# EAGLE board ATESLEME (EAGLE 9.6.2)
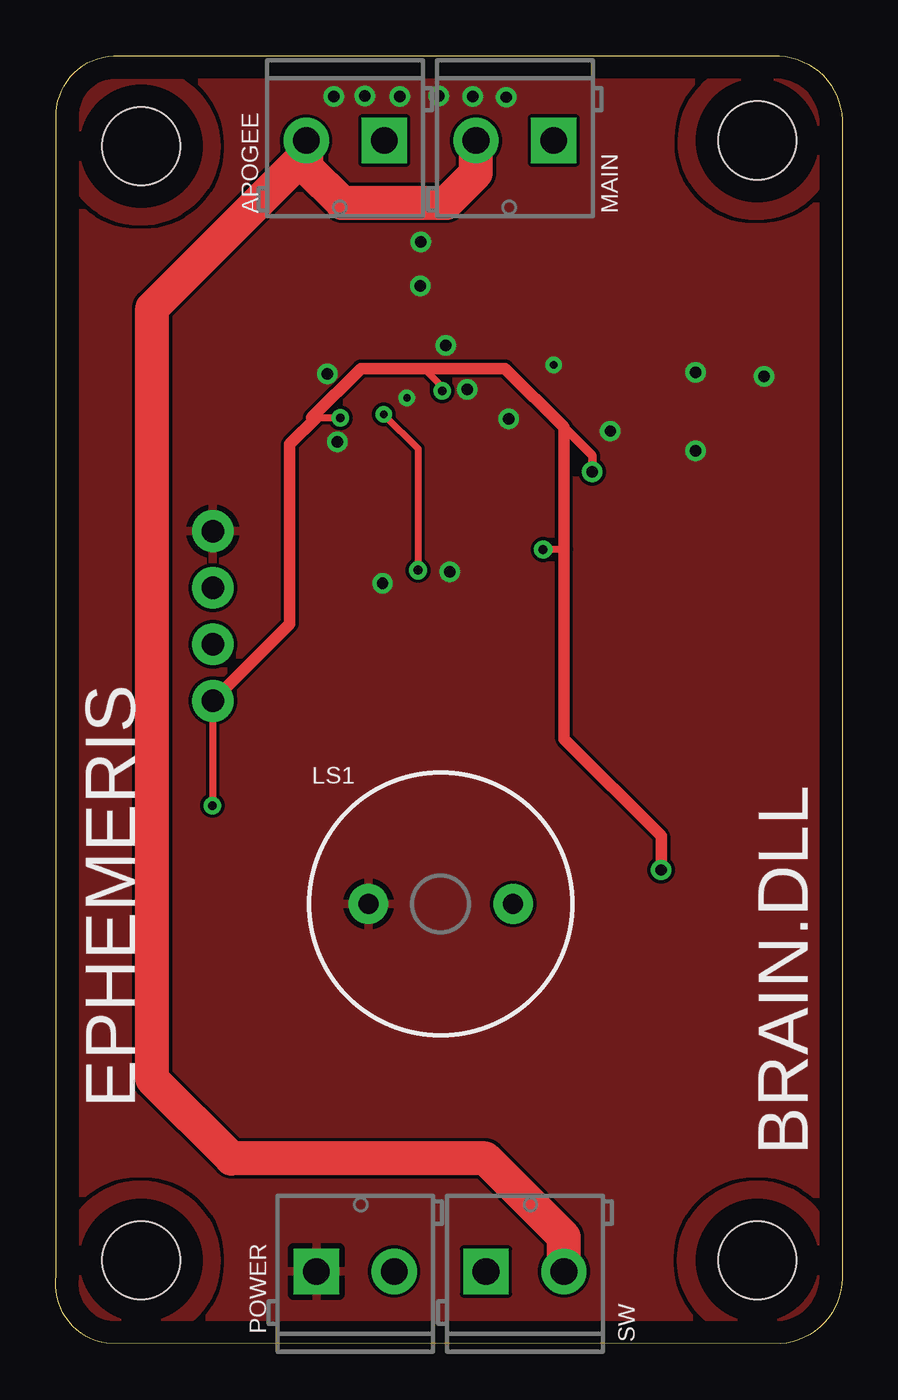
[diagram p0: board, top side]
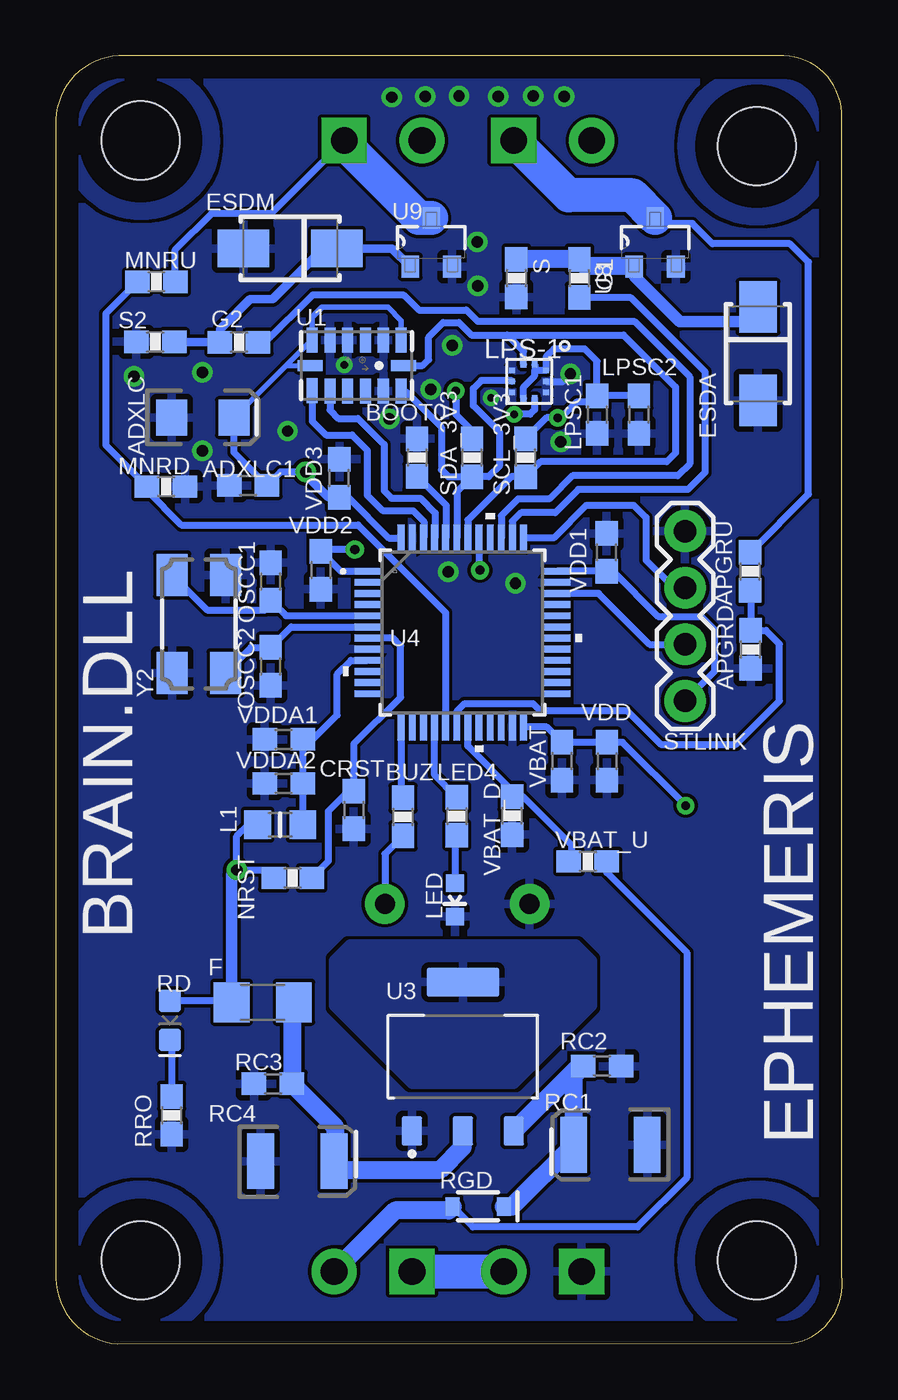
[diagram p1: board, bottom side, seen from below]

Size 35.34 x 57.86 mm. Coordinates in mm from the lower left corner, seen from the top.
Outline: 35.33,54.99 35.33,3.23 arc-90 32.56,0 2.29,0.03 arc-90 0.03,3.07 0.03,55.07 arc-90 2.62,57.86 32.23,57.86 arc-90 35.33,54.99
Copper layers (1*16): Top 0.035mm / dielectric 1.5mm / Bottom 0.035mm
Design rules "default": minimum track width 6mil, minimum drill 0.35mm, track to track 6mil, track to pad 6mil, pad to pad 6mil, via to via 6mil, smd to smd 6mil, copper to edge 40mil, drill to drill 6mil, minimum pad ring 10mil, minimum via ring 8mil, stop-mask expansion 4mil, vias tented up to drill 0mil, thermal gap 10mil
Holes 3.5 mm at 3.84,3.75 31.52,3.75 31.52,54.05 3.84,53.8

## Footprints (pad centres in the part's own frame; a part is rotated, then mirrored left to right if it is on the bottom)
EIA3216 = smd 1.4 x 1.6: + 1.4,0; - -1.4,0
0603 = smd 1.1 x 1: 1 -0.85,0; 2 0.85,0
0603-RES = smd 1.1 x 1: 1 -0.85,0; 2 0.85,0
SCREWTERMINAL-3.5MM-2-NS = drill 1.2 pad 2.032 square: 1 0,0 | drill 1.2 pad 2.032: 2 3.5,0
WE-TVSP_DO-214AC_UNIDIRECTIONAL = smd 2.3 x 1.7: 1 -2.1,0; 2 2.1,0
1206 = smd 1.6 x 1.8: 1 -1.4,0; 2 1.4,0
RC-MASTER-SMD_L0805MP = smd 1.2 x 1.3: 1 -1.016,0; 2 1.016,0
LED-0603 = smd 0.8 x 0.8: A 0,-0.75; C 0,0.75
LPS22H = smd 0.25 x 0.275: 1 -0.25,-0.762; 2 0.25,-0.762; 6 0.25,0.762; 7 -0.25,0.762 | smd 0.275 x 0.25: 3 0.762,-0.5; 4 0.762,0; 5 0.762,0.5; 8 -0.762,0.5; 9 -0.762,0; 10 -0.762,-0.5
BUZZER-12MM = drill 0.9 pad 1.778: + 3.25,0; - -3.25,0
EIA3528 = smd 1.2 x 2.5: A 1.65,0; C -1.65,0
LED-0603' = smd 1 x 1: A -0.877,0; C 0.877,0
SOD-323 = smd 0.63 x 0.83: A 1.15,0; C -1.15,0
1X04 = drill 1.016 pad 1.88: 1 0,0; 2 2.54,0; 3 5.08,0; 4 7.62,0
LGA14_1:1_PATRICK = smd 0.5 x 1.124: 1 2,1.138; 2 1.2,1.138; 3 0.4,1.138; 4 -0.4,1.138; 5 -1.2,1.138; 6 -2,1.138; 8 -2,-1.13; 9 -1.2,-1.138; 10 -0.4,-1.138; 11 0.4,-1.138; 12 1.2,-1.138; 13 2,-1.138 | smd 1.124 x 0.5: 7 -2.1,0; 14 2.1,0
SOT229P700X180-4N = smd 0.93 x 1.31: 1 -2.29,-3.345; 2 0,-3.345; 3 2.29,-3.345 | smd 3.24 x 1.31: 4 0,3.345
LQFP48-7X7MM = smd 1.194 x 0.305: 1 -4.25,2.75; 2 -4.25,2.25; 3 -4.25,1.75; 4 -4.25,1.25; 5 -4.25,0.75; 6 -4.25,0.25; 7 -4.25,-0.25; 8 -4.25,-0.75; 9 -4.25,-1.25; 10 -4.25,-1.75; 11 -4.25,-2.25; 12 -4.25,-2.75; 25 4.25,-2.75; 26 4.25,-2.25; 27 4.25,-1.75; 28 4.25,-1.25; 29 4.25,-0.75; 30 4.25,-0.25; 31 4.25,0.25; 32 4.25,0.75; 33 4.25,1.25; 34 4.25,1.75; 35 4.25,2.25; 36 4.25,2.75 | smd 0.305 x 1.194: 13 -2.75,-4.25; 14 -2.25,-4.25; 15 -1.75,-4.25; 16 -1.25,-4.25; 17 -0.75,-4.25; 18 -0.25,-4.25; 19 0.25,-4.25; 20 0.75,-4.25; 21 1.25,-4.25; 22 1.75,-4.25; 23 2.25,-4.25; 24 2.75,-4.25; 37 2.75,4.25; 38 2.25,4.25; 39 1.75,4.25; 40 1.25,4.25; 41 0.75,4.25; 42 0.25,4.25; 43 -0.25,4.25; 44 -0.75,4.25; 45 -1.25,4.25; 46 -1.75,4.25; 47 -2.25,4.25; 48 -2.75,4.25
SOT95P240X112-3N = smd 0.972 x 0.802: D 1.092,0; G -1.092,0.94; S -1.092,-0.94
OSCCC500X320X110-4N = smd 1.9 x 1.4: 1 -2.2,-1.2; 2 2.2,-1.2; 3 2.2,1.2; 4 -2.2,1.2

## Placement (x,y rotation side)
ADXLC  10uF  [EIA3216]  28.73,41.61 0 bottom
ADXLC1  0.1uF  [0603]  26.7,38.56 180 bottom
APGRD  3.3k  [0603-RES]  4.12,31.19 90 bottom
APGRU  10k  [0603-RES]  4.14,34.7 90 bottom
APOGEE  [SCREWTERMINAL-3.5MM-2-NS]  14.76,54.05 180 top
BOOT0  10k  [0603-RES]  19.1,39.81 270 bottom
BUZ  22R  [0603-RES]  19.74,23.67 270 bottom
CRST  100nF  [0603]  21.95,23.98 270 bottom
ESDA  12V  [WE-TVSP_DO-214AC_UNIDIRECTIONAL]  3.79,44.48 270 bottom
ESDM  12V  [WE-TVSP_DO-214AC_UNIDIRECTIONAL]  24.8,49.2 180 bottom
F  0.75A  [1206]  26.04,15.34 180 bottom
G1  22  [0603-RES]  11.82,47.86 270 bottom
G2  22  [0603-RES]  27.1,44.98 0 bottom
L1  [RC-MASTER-SMD_L0805MP]  25.25,23.32 0 bottom
LED  GREEN  [LED-0603]  17.4,19.94 180 bottom
LED4  1k  [0603-RES]  17.32,23.7 270 bottom
LPS-1  LPS22  [LPS22H]  14.07,43.23 180 bottom
LPSC1  4.7uF  [0603]  11.02,41.74 270 bottom
LPSC2  100nF  [0603]  9.14,41.74 270 bottom
LS1  BUZZER-PTH  [BUZZER-12MM]  17.3,19.76 0 top
MAIN  [SCREWTERMINAL-3.5MM-2-NS]  22.38,54.05 180 top
MNRD  3.3k  [0603-RES]  30.38,38.51 180 bottom
MNRU  10k  [0603-RES]  30.81,47.7 0 bottom
NRST  10k  [0603-RES]  24.69,20.93 180 bottom
OSCC1  25pF  [0603]  25.68,34.24 90 bottom
OSCC2  25pF  [0603]  25.68,30.43 270 bottom
POWER  [SCREWTERMINAL-3.5MM-2-NS]  11.71,3.25 0 top
RC1  22uF  [EIA3528]  10.42,8.94 180 bottom
RC2  100nF  [0603]  10.8,12.47 0 bottom
RC3  100nF  [0603]  25.58,11.68 180 bottom
RC4  22uF  [EIA3528]  24.49,8.2 0 bottom
RD  Red  [LED-0603']  30.2,14.53 270 bottom
RGD  1A/23V  [SOD-323]  16.36,6.17 180 bottom
RRO  1.5k  [0603-RES]  30.13,10.26 270 bottom
S  3.3k  [0603-RES]  14.64,47.87 270 bottom
S2  3.3k  [0603-RES]  30.86,45.01 180 bottom
SCL_3V3  4.7k  [0603-RES]  14.23,39.8 90 bottom
SDA_3V3  4.7k  [0603-RES]  16.64,39.8 90 bottom
STLINK  [1X04]  7.06,36.5 270 bottom
SW  [SCREWTERMINAL-3.5MM-2-NS]  19.33,3.25 0 top
U1  ADXL345PATRICK  [LGA14_1:1_PATRICK]  21.82,43.94 0 bottom
U3  AMS1117-3.3  [SOT229P700X180-4N]  17.05,12.9 0 bottom
U4  STM32F102CBT6  [LQFP48-7X7MM]  17.07,31.95 0 bottom
U8  [SOT95P240X112-3N]  8.41,49.48 90 bottom
U9  [SOT95P240X112-3N]  18.47,49.48 90 bottom
VBAT  100nF  [0603]  12.59,26.17 270 bottom
VBAT_D  3.3k  [0603-RES]  14.84,23.72 90 bottom
VBAT_U  10k  [0603-RES]  11.43,21.67 0 bottom
VDD  4.7uF  [0603]  10.57,26.17 270 bottom
VDD1  100nF  [0603]  10.59,35.55 90 bottom
VDD2  100nF  [0603]  23.43,34.75 270 bottom
VDD3  100nF  [0603]  22.6,38.88 90 bottom
VDDA1  1uF  [0603]  25.1,27.15 180 bottom
VDDA2  100nF  [0603]  25.1,25.17 180 bottom
Y2  ABM2B-8.000MHZ-10-1-U-T  [OSCCC500X320X110-4N]  28.91,32.33 270 bottom

## Library data of the parts
ADXLC = SparkFun-Capacitors; PROD_ID: CAP-00811
ADXLC1 CRST LPSC1 LPSC2 OSCC1 OSCC2 RC2 RC3 VBAT VDD VDD1-VDD3 VDDA1 VDDA2 = SparkFun-Capacitors; PROD_ID: CAP-00810
APGRD APGRU BOOT0 BUZ G1 G2 LED4 MNRD MNRU NRST RRO S S2 SCL_3V3 SDA_3V3 VBAT_D VBAT_U = SparkFun-Resistors; PROD_ID: RES-08296
APOGEE MAIN POWER SW = SparkFun-Connectors; PROD_ID: CONN-08399
ESDA ESDM = Wurth_EMC Components_WE-TVSP; DATASHEET-URL: https://www.we-online.com/catalog/datasheet/824500102.pdf; IPEAK: 2.5A; MOUNT: SMT; PART-NUMBER: 824500102; PDISS: 400W; VBR: 117V; VCLAMP: 162V
F = SparkFun-Fuses; PROD_ID: RES-11150
L1 = 52101-101-REV-A_v16
LED = SparkFun-LED; PROD_ID: DIO-00819
LPS-1 = Arduino-Sensors; CODE-ARDUINO: A5390; DATASHEET: https://www.st.com/content/ccc/resource/technical/document/datasheet/bf/c1/4f/23/61/17/44/8a/DM00140895.pdf/files/DM00140895.pdf/jcr:content/translations/en.DM00140895.pdf; DISTRIBUTOR-LINK: https://www.digikey.com/product-detail/en/stmicroelectronics/LPS22HBTR/497-16265-1-ND/5799917; DISTRIBUTOR-PN: 497-16265-1-ND; MANUFACTURER: ST; MANUFACTURER-PN: LPS22HBTR
LS1 = SparkFun-Electromechanical; PROD_ID: COMP-08253; SF_SKU: COM-07950
RC1 RC4 = SparkFun-Capacitors; PROD_ID: CAP-08063
RD = SparkFun-LED; PROD_ID: DIO-11154
RGD = SparkFun-DiscreteSemi; PROD_ID: DIO-11623
STLINK = SparkFun-Connectors; PROD_ID: CONN-09696
U1 = Testing
U3 = AMS1117-3.3; AVAILABILITY: Unavailable; DESCRIPTION: Sot223/Pkg 1-Amp 3.3-Volt Low Drop Out Voltage Regulatator; MF: Advanced Monolithic Systems; MP: AMS1117-3.3; PACKAGE: SOT-89 ams; PRICE: None
U4 = STM32F102CBT6; BUILT_BY: EMA_UL_Team; COPYRIGHT: Copyright (C) 2018 Accelerated Designs. All rights reserved; MANUFACTURER_PART_NUMBER: STM32F102CBT6; SOURCELIBRARY: Updates_to_database_2020-10-19; VENDOR: STMicroelectronics
U8 U9 = IRLML6344TRPBF; AVAILABILITY: Good; DESCRIPTION: N-Channel 30V 5A (Ta) 1.3W (Ta) Surface Mount Micro3™/SOT-23; MF: Infineon Technologies; MP: IRLML6344TRPBF; PACKAGE: SOT-23 Multicomp; PRICE: None; PURCHASE-URL: https://pricing.snapeda.com/search/part/IRLML6344TRPBF/?ref=eda
Y2 = ABM3B-26.000MHZ-10-1-U-T; AVAILABILITY: Good; DESCRIPTION: 26MHz ±10ppm Crystal 10pF 50 Ohms 4-SMD, No Lead; MF: Abracon; MP: ABM3B-26.000MHZ-10-1-U-T; PACKAGE: SMD-4 Abracon LLC; PRICE: None; PURCHASE-URL: https://pricing.snapeda.com/search/part/ABM3B-26.000MHZ-10-1-U-T/?ref=eda

## Nets
3.3V: ADXLC1.1 ADXLC.+ F.2 L1.1 LPS-1.1 LPS-1.6 LPS-1.10 LPSC1.1 LPSC2.1 NRST.2 RD.A SCL_3V3.2 SDA_3V3.2 STLINK.4 U1.1 U1.6 U1.7 U4.1 U4.24 U4.36 U4.48 VBAT.1 VDD1.1 VDD2.1 VDD3.1 VDD.1
APG: G1.2 U4.38
BOOT0: BOOT0.2 U4.44
BUZZER: BUZ.1 U4.13
GND: ADXLC1.2 ADXLC.- APGRD.1 BOOT0.1 CRST.2 ESDA.2 ESDM.2 LED.C LPS-1.3 LPS-1.5 LPS-1.8 LPS-1.9 LPSC1.2 LPSC2.2 LS1.- MNRD.1 OSCC1.2 OSCC2.2 POWER.1 RC1.C RC2.2 RC3.2 RC4.C RRO.2 S2.2 S.2 STLINK.1 U1.2 U1.4 U1.5 U1.12 U3.1 U4.8 U4.23 U4.35 U4.47 U8.S U9.S VBAT.2 VBAT_D.1 VDD1.2 VDD2.2 VDD3.2 VDD.2 VDDA1.2 VDDA2.2 Y2.2 Y2.4
HT: U3.4
IN1: U1.8 U4.46
IN2: U1.9 U4.45
INT1: LPS-1.7 U4.41
LED: LED4.1 U4.16
MN: G2.2 U4.39
N$1: F.1 RC3.1 RC4.A U3.2
N$2: RD.C RRO.1
N$8: ESDM.1 G2.1 S2.1 U9.G
N$10: LED4.2 LED.A
N$13: BUZ.2 LS1.+
N$14: ESDA.1 G1.1 S.1 U8.G
NRST: CRST.1 NRST.1 U4.7
OSC_OUT: OSCC2.1 U4.6 Y2.3
OSC_ıN: OSCC1.1 U4.5 Y2.1
PC13: U4.2
SCL_3V3: LPS-1.2 SCL_3V3.1 U1.14 U4.42
SDA_3V3: LPS-1.4 SDA_3V3.1 U1.13 U4.43
SWCLK: STLINK.2 U4.37
SWDIO: STLINK.3 U4.34
VAPG: APGRU.2 APOGEE.1 U8.D
VAPGS: APGRD.2 APGRU.1 U4.18
VCC: POWER.2 SW.1
VDDA: L1.2 U4.9 VDDA1.1 VDDA2.1
VIN: APOGEE.2 MAIN.2 RGD.A SW.2 VBAT_U.2
VMN: MAIN.1 MNRU.2 U9.D
VMNS: MNRD.2 MNRU.1 U4.17
VNR: RC1.A RC2.1 RGD.C U3.3
VSENS: U4.19 VBAT_D.2 VBAT_U.1

## Tracks (layer width: path | path; a pad name or v marks a point on that pad's centre or on a via)
3.3V  (via drill 0.38, 0.41, 0.51)
  Top 0.305: 11.51,41.61 11.71,41.61 12.58,41.61 12.59,41.6 v12.79,41.6 | v7.04,24.18 7.06,24.21 STLINK.4 | 22.84,35.68 v21.9,35.68 | v17.37,42.81 17.37,43 16.55,43.82 15.5,43.82
  Top 0.381: v24.11,39.17 24.11,39.9 22.84,41.17
  Top 0.508: v27.21,21.29 27.21,22.81 22.84,27.18 22.84,35.68 22.84,41.17 20.2,43.82 15.5,43.82 13.72,43.82 11.51,41.61 | 11.71,41.61 10.52,40.41 10.52,32.33 STLINK.4
  Bottom 0.152: LPS-1.10 | LPS-1.1
  Bottom 0.229: U1.7 24.99,43.94 ADXLC.+ 23.85,45.08 U1.6
  Bottom 0.254: U1.1 19.82,45.97 20.42,46.56 23.38,46.56 23.82,46.12 U1.6
  Bottom 0.305: F.2 27.5,15.41 RD.A | VDD3.1 22.21,38.03 20.38,36.2 U4.48 | 13.81,43.73 LPS-1.10 | v17.37,42.81 17.37,41.75 16.64,41.02 SDA_3V3.2 | SCL_3V3.2 13.28,41.6 v12.79,41.6 12.72,41.52 11.95,42.29 11.32,42.29 LPSC1.1 | LPSC2.1 LPSC1.1 | STLINK.4 5.74,30.2 5.74,32.08 6.34,32.68 8.28,32.68 10.3,34.7 VDD1.1 U4.36 | v7.04,24.18 9.88,27.02 VDD.1 VBAT.1 13.27,27.7 U4.24 | v24.11,39.17 25.24,39.17 ADXLC1.1 27.33,40.04 ADXLC.+ | LPS-1.10 13.31,44.34 12.96,44.68 11.56,44.68 11.02,44.14 LPSC1.1 | LPS-1.6 14.32,42.98 13.81,43.49 13.81,43.73 | LPS-1.1 13.81,43.73 | L1.1 26.7,23.32 27.21,22.81 v27.21,21.29 25.9,21.29 NRST.2 | v21.9,35.68 23.35,35.68 VDD2.1 22.53,34.7 U4.1
  Bottom 0.381: VDD3.1 23.1,38.03 24.11,39.03 v24.11,39.17
  Bottom 0.508: v27.21,21.29 27.44,21.05 F.2
APG
  Bottom 0.305: G1.2 9.52,47.01 6.17,43.66 6.17,39.14 6.94,38.37 11.86,38.37 12.89,37.34 14.43,37.34 14.82,36.95 U4.38
BOOT0
  Bottom 0.305: BOOT0.2 19.09,38.96 17.8,37.67 17.8,36.23 U4.44
BUZZER
  Bottom 0.305: U4.13 19.82,24.61 BUZ.1
D
  pour Bottom: 35.03,54.05 arc90 31.52,57.56 arc90 28.02,54.03 arc90 31.5,50.55 arc90
  pour Bottom: 7.34,53.8 arc90 3.81,57.3 arc90 0.33,53.77 arc90 3.84,50.29 arc90
  pour Bottom: 7.34,3.76 arc90 3.81,7.26 arc90 0.33,3.78 arc90 3.86,0.25 arc90
  pour Bottom: 35.03,3.76 arc90 31.52,7.26 arc90 28.02,3.76 arc90 31.52,0.25 arc90
  pour Top: 0.33,3.78 arc-90 3.81,7.26 3.84,7.26 arc-90 7.34,3.76 7.34,3.71 arc-90 3.89,0.25 3.86,0.25 arc-90
  pour Top: 27.98,3.75 arc-90 31.52,7.26 arc-90 35,3.73 arc-90 31.47,0.26 arc-90
  pour Top: 28.02,54.03 arc-90 31.55,57.56 arc-90 35.03,54.05 arc-90 31.47,50.55 arc-90
  pour Top: 0.33,53.82 arc-90 3.81,57.3 arc-90 7.34,53.77 arc-90 3.79,50.29 arc-90
GND  (via drill 0.33, 0.51)
  Bottom 0.305: LPS-1.9 12.55,43.23 v12.21,43.57
  other vias: 15.78,42.49 12.65,40.51 18.49,42.88 20.35,41.55 17.52,44.85 17.71,34.67 14.68,34.16 22.38,43.97 24.92,41 16.38,47.51 16.41,49.49 20.24,56 18.74,56.02 17.22,56.05 15.47,56.02 13.89,56.05 12.49,56.02 28.75,43.64 31.83,43.46 28.75,40.11
  pour Bottom (rank 2): 35.59,58.24 35.59,-0.28 -0.46,-0.28 -0.46,58.24
  pour Top (rank 2): 35.71,58.32 35.71,-0.48 -0.56,-0.48 -0.56,58.32
HT
  pour Bottom: 19.33,11.63 14.76,11.63 11.2,15.19 11.2,17.22 11.97,17.98 22.13,17.98 22.89,17.22 22.89,15.19
IN1
  Bottom 0.305: U1.8 23.82,41.45 23.19,40.82 22.02,40.82 21.33,40.13 21.33,38.11 20.63,37.41 19.27,37.41 18.8,36.94 18.8,36.23 U4.46
IN2
  Bottom 0.305: U1.9 23.02,41.94 22.65,41.57 21.76,41.57 20.59,40.39 20.59,38.32 20.26,37.99 18.96,37.99 18.3,37.32 18.3,36.23 U4.45
INT1  (via drill 0.35, 0.41)
  Top 0.305: v14.74,41.75 16.28,40.21 v16.28,34.75
  Bottom 0.152: LPS-1.7 | v14.74,41.75 14.73,41.76
  Bottom 0.305: LPS-1.7 13.83,41.96 14.03,41.76 14.73,41.76 | U4.41 16.32,34.78 v16.28,34.75
LED
  Bottom 0.305: U4.16 18.32,25.54 LED4.1
MN
  Bottom 0.305: G2.2 25.92,44.98 23.79,47.12 19.72,47.12 19.03,46.43 16.89,46.43 16.39,45.93 9.35,45.93 6.86,43.43 6.86,39.52 7.39,38.99 12.12,38.99 13.16,37.95 14.57,37.95 15.32,37.2 U4.39
N$1
  Bottom 0.813: F.1 24.73,15.25 RC3.1 22.8,9.75 22.8,8.24 RC4.A 22.46,7.82 18.06,7.82 17.05,8.84 U3.2
N$2
  Bottom 0.305: RD.C 30.13,13.58 RRO.1
N$8
  Bottom 0.381: S2.1 29.99,44.98 G2.1 27.95,45.57 26.6,46.92 25.6,46.92 23.32,49.2 ESDM.1 20.22,49.2 U9.G
N$10
  Bottom 0.229: LED4.2 17.4,22.77
  Bottom 0.305: 17.4,22.77 LED.A
N$13
  Bottom 0.305: BUZ.2 20.55,22.01 LS1.+
N$14
  Bottom 0.508: U8.G 9.35,47.96 7.3,45.91 4.46,45.91 ESDA.1
  Bottom 0.813: U8.G 11.5,48.4 G1.1 S.1
NRST
  Bottom 0.305: NRST.1 23.09,21.68 23.09,23.93 22.19,24.83 CRST.1 21.95,26.93 19.84,29.04 19.84,31.35 20.19,31.7 U4.7
OSC_OUT
  Bottom 0.305: Y2.3 26.56,31.28 OSCC2.1 24.76,32.2 U4.6
OSC_ıN
  Bottom 0.229: 25.59,33.29 OSCC1.1
  Bottom 0.305: Y2.1 28.54,32.97 25.91,32.97 25.59,33.29 25,32.7 U4.5
SCL_3V3
  Bottom 0.305: U1.14 18.85,43.94 18.59,44.21 18.59,45.22 17.93,45.87 17.23,45.87 16.66,45.31 15.05,45.31 | 15.05,45.31 9.82,45.31 7.5,42.98 7.5,40.02 7.89,39.63 13.55,39.63 SCL_3V3.1 14.87,38.95 16.82,37 U4.42 | LPS-1.2 14.32,44.59 15.05,45.31
SDA_3V3
  Bottom 0.305: SDA_3V3.1 15.89,38.95 15.39,39.45 15.39,40.95 16.58,42.14 16.58,42.92 16.22,43.28 14.88,43.28 LPS-1.4 | U1.13 19.74,42.73 19.56,42.73 18.01,41.17 18.01,39.27 17.69,38.95 SDA_3V3.1 | U4.43 17.32,38.27 SDA_3V3.1
SWCLK
  Bottom 0.305: STLINK.2 7.58,33.96 8.82,35.2 8.82,37.12 9.37,37.67 11.49,37.67 12.96,36.2 U4.37
SWDIO
  Bottom 0.305: STLINK.3 8.66,31.42 10.95,33.7 U4.34
VAPG
  Bottom 0.305: APGRU.2 1.53,38.16 1.53,48.59 2.35,49.42 5.83,49.42 6.73,50.32 8.16,50.32 U8.D
  Bottom 1.524: U8.D 9.43,51.59 12.3,51.59 APOGEE.1
VAPGS
  Bottom 0.229: APGRU.1 4.12,33.82
  Bottom 0.305: 4.12,33.82 APGRD.2 3.43,32.04 2.82,31.43 2.82,28.88 4.78,26.92 8.16,26.92 9.66,28.43 13.57,28.43 13.9,28.75 16.97,28.75 17.32,28.4 U4.18
VCC
  Bottom 1.524: SW.1 POWER.2
VDDA
  Bottom 0.229: 23.79,27.15 VDDA1.1 | L1.2 24.25,23.33
  Bottom 0.305: 23.79,27.15 22.7,28.24 22.7,30.08 22.07,30.7 U4.9 | VDDA1.1 VDDA2.1 24.25,23.33
VIN
  Top 0.813: APOGEE.2 11.26,53.44
  Top 1.524: 11.26,53.44 4.35,46.53 4.35,11.89 7.9,8.33 19.3,8.33 22.83,4.8 SW.2 | APOGEE.2 11.26,52.86 12.86,51.26 17.55,51.26 18.88,52.58 MAIN.2
  Bottom 0.305: VBAT_U.2 10.58,21.17 6.99,17.58 6.99,7.47 9.2,5.26 16.59,5.26 RGD.A
  Bottom 0.813: SW.2 20.09,5.99 17.69,5.99 RGD.A
VMN
  Bottom 0.305: MNRU.2 29.96,49.15 28.34,50.77 25.66,50.77 MAIN.1
  Bottom 1.524: U9.D 19.03,50.57 22.38,53.92 MAIN.1
VMNS
  Bottom 0.229: MNRD.2 31.23,38.32
  Bottom 0.305: MNRD.2 33.08,40.36 33.08,46.28 MNRU.1 | 31.23,38.32 29.69,36.78 21.75,36.78 17.82,32.85 17.82,27.72 U4.17
VNR
  Bottom 0.813: RGD.C 14.83,6.17 RC1.A 12.07,12.05 RC2.1 11.84,12.47 U3.3
VSENS
  Bottom 0.305: VBAT_U.1 12.17,21.78 12.17,22.41 14.33,24.57 VBAT_D.2 14.84,24.87 16.82,26.85 U4.19

## Text on the board
tPlace: BRAIN.DLL | EPHEMERIS
bPlace: BRAIN.DLL | EPHEMERIS